# EAGLE board astronaut_mainboard_2 (EAGLE 7.5.0)
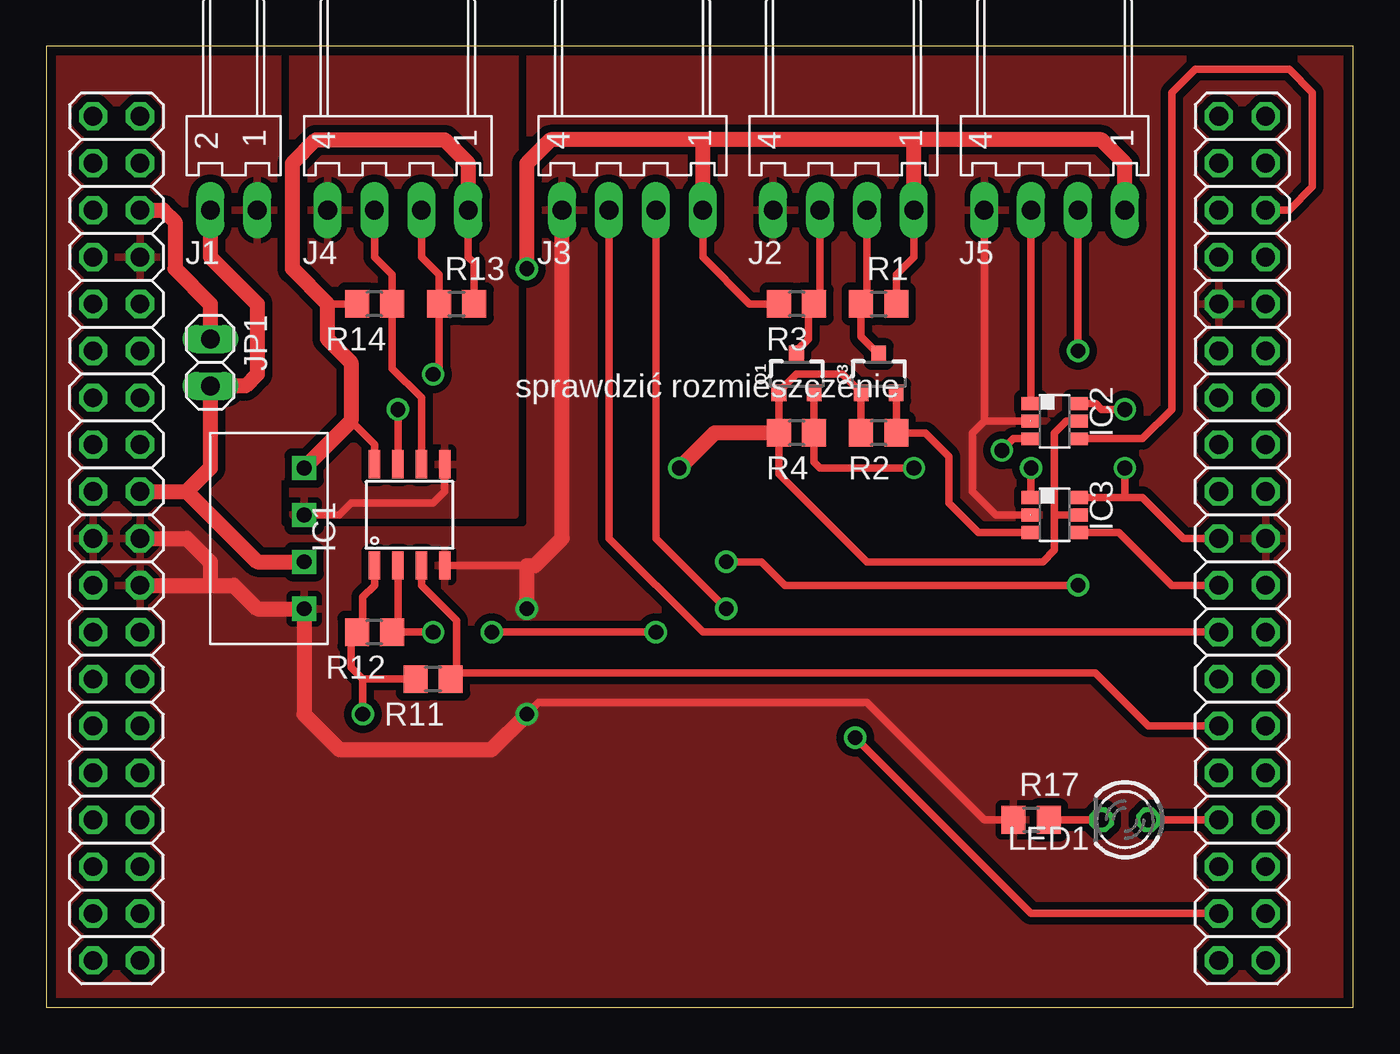
[diagram p0: board, top side]
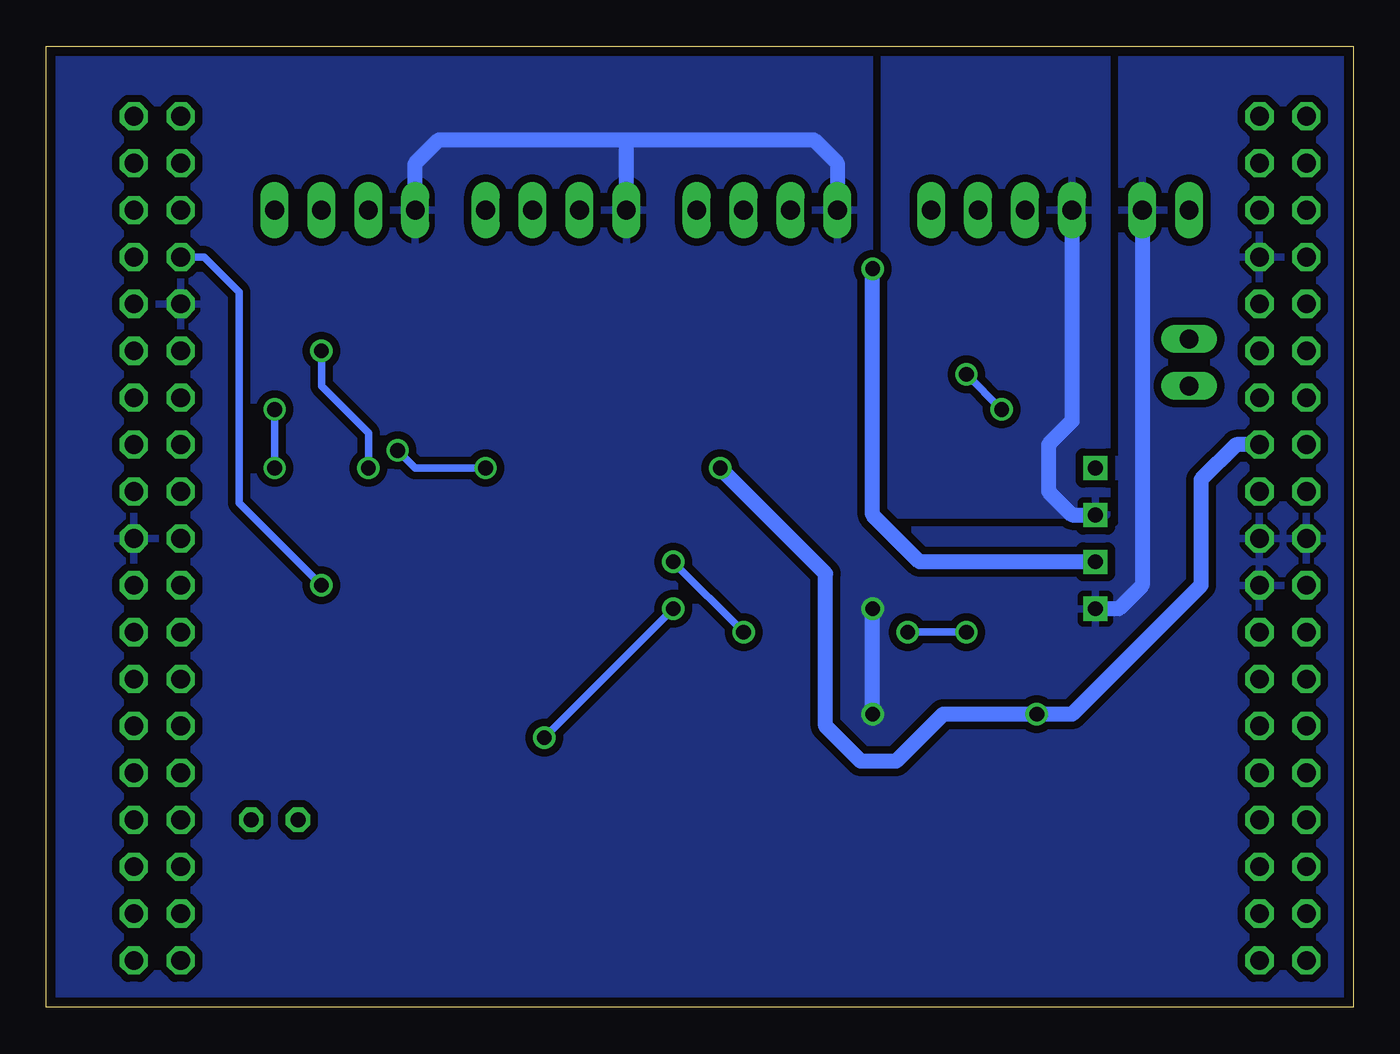
[diagram p1: board, bottom side, seen from below]

Size 70.79 x 52.06 mm. Coordinates in mm from the lower left corner, seen from the top.
Outline: 0,0 70.79,0 70.79,52.06 0,52.06 0,0
Copper layers (1*16): Top 0.035mm / dielectric 1.5mm / Bottom 0.035mm
Design rules "default *": minimum track width 12mil, minimum drill 24mil, track to track 12mil, track to pad 12mil, pad to pad 10mil, via to via 12mil, smd to smd 10mil, copper to edge 20mil, drill to drill 12mil, minimum pad ring 10mil, minimum via ring 8mil, stop-mask expansion 4mil, vias tented up to drill 0mil, thermal gap 12mil

## Footprints (pad centres in the part's own frame; a part is rotated, then mirrored left to right if it is on the bottom)
SO8-COOL = smd 0.61 x 1.524: 1 -1.905,-2.743; 2 -0.635,-2.743; 3 0.635,-2.743; 4 1.905,-2.743; 5 1.905,2.743; 6 0.635,2.743; 7 -0.635,2.743; 8 -1.905,2.743
DBV_R-PDSO-G6 = smd 0.69 x 0.99: 1 -0.95,-1.29; 2 0,-1.29; 3 0.95,-1.29; 4 0.95,1.3; 5 0,1.3; 6 -0.95,1.3
7395-02 = drill 1.016 long: 1 1.27,0; 2 -1.27,0
7395-04 = drill 1.016 long: 1 3.81,0; 2 1.27,0; 3 -1.27,0; 4 -3.81,0
1X02 = drill 1.016 long: 1 -1.27,0; 2 1.27,0
LED3MM = drill 0.813 octagon: A -1.27,0; K 1.27,0
SOT23-3 = smd 0.8 x 0.9: 1 -0.95,-1; 2 0.95,-1; 3 0,1.1
R0805 = smd 1.3 x 1.5: 1 -0.95,0; 2 0.95,0
SIP4 = drill 0.8 square: P$1 1.27,0; P$2 3.81,0; P$3 6.35,0; P$4 8.89,0
MORPHO_HEADERS = drill 1.016 octagon: 1 -31.75,22.86; 2 -29.21,22.86; 3 -31.75,20.32; 4 -29.21,20.32; 5 -31.75,17.78; 6 -29.21,17.78; 7 -31.75,15.24; 8 -29.21,15.24; 9 -31.75,12.7; 10 -29.21,12.7; 11 -31.75,10.16; 12 -29.21,10.16; 13 -31.75,7.62; 14 -29.21,7.62; 15 -31.75,5.08; 16 -29.21,5.08; 17 -31.75,2.54; 18 -29.21,2.54; 19 -31.75,0; 20 -29.21,0; 21 -31.75,-2.54; 22 -29.21,-2.54; 23 -31.75,-5.08; 24 -29.21,-5.08; 25 -31.75,-7.62; 26 -29.21,-7.62; 27 -31.75,-10.16; 28 -29.21,-10.16; 29 -31.75,-12.7; 30 -29.21,-12.7; 31 -31.75,-15.24; 32 -29.21,-15.24; 33 -31.75,-17.78; 34 -29.21,-17.78; 35 -31.75,-20.32; 36 -29.21,-20.32; 37 -31.75,-22.86; 38 -29.21,-22.86; 39 29.21,22.86; 40 31.75,22.86; 41 29.21,20.32; 42 31.75,20.32; 43 29.21,17.78; 44 31.75,17.78; 45 29.21,15.24; 46 31.75,15.24; 47 29.21,12.7; 48 31.75,12.7; 49 29.21,10.16; 50 31.75,10.16; 51 29.21,7.62; 52 31.75,7.62; 53 29.21,5.08; 54 31.75,5.08; 55 29.21,2.54; 56 31.75,2.54; 57 29.21,0; 58 31.75,0; 59 29.21,-2.54; 60 31.75,-2.54; 61 29.21,-5.08; 62 31.75,-5.08; 63 29.21,-7.62; 64 31.75,-7.62; 65 29.21,-10.16; 66 31.75,-10.16; 67 29.21,-12.7; 68 31.75,-12.7; 69 29.21,-15.24; 70 31.75,-15.24; 71 29.21,-17.78; 72 31.75,-17.78; 73 29.21,-20.32; 74 31.75,-20.32; 75 29.21,-22.86; 76 31.75,-22.86

## Placement (x,y rotation side)
IC1  ADUM1250  [SO8-COOL]  19.68,26.67 0 top
IC2  741G3157DBVR  [DBV_R-PDSO-G6]  54.61,31.75 270 top
IC3  741G3157DBVR  [DBV_R-PDSO-G6]  54.61,26.67 270 top
J1  EXT_SUPP  [7395-02]  10.16,43.18 0 top
J2  Arduino Mega (UART)  [7395-04]  43.18,43.18 0 top
J3  HF Comm (UART)  [7395-04]  31.75,43.18 0 top
J4  User Interface (I2C)  [7395-04]  19.05,43.18 0 top
J5  GNSS (UART)  [7395-04]  54.61,43.18 0 top
JP1  [1X02]  8.89,34.92 270 top
LED1  [LED3MM]  58.42,10.16 180 top
Q1  BSS138  [SOT23-3]  40.64,34.29 0 top
Q3  BSS138  [SOT23-3]  45.08,34.29 0 top
R1  10k  [R0805]  45.08,38.1 0 top
R2  10k  [R0805]  45.08,31.11 180 top
R3  10k  [R0805]  40.64,38.1 180 top
R4  10k  [R0805]  40.64,31.11 180 top
R11  470  [R0805]  20.96,17.78 180 top
R12  470  [R0805]  17.78,20.32 180 top
R13  470  [R0805]  22.23,38.1 0 top
R14  470  [R0805]  17.78,38.1 180 top
R17  470  [R0805]  53.34,10.16 0 top
U$2  AM1S-0505  [SIP4]  13.97,20.32 90 top
U$3  NUCLEO_F411RE_MORPHO  [MORPHO_HEADERS]  34.29,25.4 0 top

## Library data of the parts
IC1 = analog-devices-3
IC2 IC3 = 74xx-little-de
J1-J5 = EP_molex_6410_7395
JP1 = pinhead
LED1 = led
Q1 Q3 = SparkFun-DiscreteSemi; PROD_ID: TRANS-12988
R1-R4 R11-R14 R17 = rcl
U$2 = am1s
U$3 = stm32_nucleo_shield

## Nets
+5V: J1.2 J2.1 J3.1 J5.1 JP1.2 R1.2 R3.2 U$2.P$2 U$3.18
AGND: U$3.70
ARDU_PIN_1: J2.2 Q3.3 R1.1
ARDU_PIN_2: J2.3 Q1.3 R3.1
E5V: JP1.1 U$3.6
GND: IC1.4 IC2.2 IC3.2 J1.1 J2.4 J3.4 J5.4 R17.1 U$2.P$1 U$3.8 U$3.19 U$3.20 U$3.22 U$3.47 U$3.58
GND4: IC1.5 J4.4 U$2.P$3
I2C2_SCL: IC1.3 R11.1 U$3.65
I2C2_SDA: IC1.2 R12.1 U$3.45
LED_DGB: LED1.A U$3.69
N$1: IC1.7 J4.2 R13.1
N$3: LED1.K R17.2
N$4: IC1.6 J4.3 R14.1
U5V: U$3.46
USART1_RX: J3.2 U$3.73
USART1_TX: J3.3 U$3.61
USART6_RX: IC3.4 U$3.59
USART6_RX_A: IC3.3 Q3.2 R2.1
USART6_RX_G: IC3.1 J5.2
USART6_SEL: IC2.6 IC3.6 U$3.57
USART6_TX: IC2.4 U$3.44
USART6_TX_A: IC2.3 Q1.2 R4.1
USART6_TX_G: IC2.1 J5.3
VBAT: U$3.33
VCC: IC1.1 IC2.5 IC3.5 Q1.1 Q3.1 R2.2 R4.2 R11.2 R12.2 U$3.16
VDD: U$3.5
VEE: IC1.8 J4.1 R13.2 R14.2 U$2.P$4
VIN: U$3.24

## Tracks (layer width: path | path; a pad name or v marks a point on that pad's centre or on a via)
+5V  (via drill 0.8)
  Top 0.406: R1.2 46.03,39.69 46.99,40.64 J2.1 | J3.1 35.56,40.64 38.1,38.1 R3.2
  Top 0.813: U$3.18 7.62,27.94 | 7.62,27.94 11.43,24.13 U$2.P$2 | J5.1 58.42,45.72 57.15,46.99 46.99,46.99 | J2.1 46.99,46.99 | 46.99,46.99 35.56,46.99 | 35.56,46.99 27.3,46.99 26.04,45.72 v26.04,40.01 | J3.1 35.56,46.99 | 7.62,27.94 8.89,29.21 JP1.2 10.79,33.66 11.43,34.29 11.43,38.1 8.89,40.64 J1.2
  Bottom 0.813: U$2.P$2 23.5,24.13 26.04,26.67 v26.04,40.01
ARDU_PIN_1
  Top 0.406: J2.2 44.45,38.41 R1.1 44.13,36.34 Q3.3
ARDU_PIN_2
  Top 0.406: J2.3 41.91,38.42 R3.1 41.27,37.78 41.27,36.2 40.64,35.56 Q1.3
E5V
  Top 0.813: U$3.6 6.35,43.18 6.99,42.55 6.99,40.01 8.89,38.1 JP1.1
GND  (via drill 0.8)
  Top 0.406: IC3.2 51.43,26.67 50.16,27.94 50.16,31.11 50.8,31.75 | 50.8,31.75 IC2.2 | 50.8,31.75 J5.4 | IC1.4 26.04,23.93 | v26.04,15.88 26.67,16.51 44.45,16.51 50.8,10.16 R17.1
  Top 0.813: U$3.22 8.89,22.86 | v26.04,15.88 24.13,13.97 15.88,13.97 13.97,15.88 U$2.P$1 11.43,21.59 10.16,22.86 8.89,22.86 | J3.4 27.94,25.4 26.47,23.93 26.04,23.93 v26.04,21.59 | U$3.20 7.62,25.4 8.89,24.13 8.89,22.86
  Bottom 0.813: J5.4 50.8,45.72 49.53,46.99 39.37,46.99 | 39.37,46.99 29.21,46.99 27.94,45.72 J3.4 | J2.4 39.37,46.99 | v26.04,15.88 v26.04,21.59 | J1.1 11.43,22.86 12.7,21.59 U$2.P$1
  pour Top (isolate 0.406, rank 6): 0,52.07 71.12,52.07 71.12,0 0,0
  pour Bottom (isolate 0.406, rank 6): 0,52.07 71.12,52.07 71.12,0 0,0
GND4
  Top 0.406: IC1.5 21.59,27.94 20.96,27.3 16.51,27.3 15.88,26.67 U$2.P$3
  Bottom 0.813: J4.4 15.24,31.75 16.51,30.48 16.51,27.94 15.24,26.67 U$2.P$3
  pour Top (isolate 0.406): 13.34,52.07 25.4,52.07 25.4,26.67 13.34,26.67
  pour Bottom (isolate 0.406): 25.4,52.07 25.4,26.67 13.34,26.67 13.34,52.07
I2C2_SCL
  Top 0.406: IC1.3 20.32,22.86 22.23,20.95 22.23,18.1 | 22.23,18.1 R11.1 | 22.23,18.1 56.83,18.1 59.69,15.24 U$3.65
I2C2_SDA  (via drill 0.8)
  Top 0.406: R12.1 19.05,20.64 IC1.2 19.05,20.32 v20.96,20.32 | v24.13,20.32 v33.02,20.32 | v36.83,24.13 38.73,24.13 40,22.86 v55.88,22.86
  Bottom 0.406: v20.96,20.32 v24.13,20.32 | v33.02,20.32 v36.83,24.13 | v55.88,22.86 60.32,27.3 60.32,38.73 62.23,40.64 U$3.45
LED_DGB
  Top 0.406: U$3.69 LED1.A
N$1  (via drill 0.8)
  Top 0.406: J4.2 20.32,40.64 21.28,39.69 R13.1 21.28,34.61 v20.96,34.29 | IC1.7 v19.05,32.38
  Bottom 0.406: v19.05,32.38 v20.96,34.29
N$3
  Top 0.406: LED1.K R17.2
N$4
  Top 0.406: J4.3 17.78,40.64 18.73,39.69 R14.1 18.73,34.61 20.32,33.02 IC1.6
USART1_RX  (via drill 0.8)
  Top 0.406: U$3.73 53.34,5.08 v43.81,14.61 | v36.83,21.59 33.02,25.4 J3.2
  Bottom 0.406: v36.83,21.59 v43.81,14.61
USART1_TX
  Top 0.406: U$3.61 35.56,20.32 30.48,25.4 J3.3
USART6_RX
  Top 0.406: IC3.4 58.1,25.72 60.96,22.86 U$3.59
USART6_RX_A
  Top 0.406: Q3.2 R2.1 47.62,31.11 48.89,29.84 48.89,27.3 50.48,25.72 IC3.3
USART6_RX_G  (via drill 0.8)
  Top 0.406: J5.2 v55.88,35.56 | IC3.1 53.32,29.19 v53.34,29.21
  Bottom 0.406: v53.34,29.21 53.34,31.11 55.88,33.66 v55.88,35.56
USART6_SEL  (via drill 0.8)
  Top 0.406: IC3.6 58.42,27.62 | 58.42,27.62 59.38,27.62 61.59,25.4 U$3.57 | IC2.6 56.83,32.7 57.15,32.38 v58.42,32.38 | v58.42,29.21 58.42,27.62
  Bottom 0.406: v58.42,32.38 v58.42,29.21
USART6_TX
  Top 0.406: U$3.44 67.31,43.18 68.58,44.45 68.58,49.53 67.31,50.8 62.23,50.8 60.96,49.53 60.96,32.38 59.38,30.8 IC2.4
USART6_TX_A  (via drill 0.8)
  Top 0.406: Q1.2 R4.1 41.59,29.53 41.91,29.21 v46.99,29.21 | IC2.3 52.39,30.8 v51.75,30.16
  Bottom 0.406: v46.99,29.21 50.8,29.21 v51.75,30.16
USART6_TX_G
  Top 0.406: IC2.1 53.32,43.16 J5.3
VCC  (via drill 0.8)
  Top 0.406: IC1.1 17.78,22.86 17.14,22.23 17.14,20.64 R12.2 16.51,20 16.51,18.41 17.14,17.78 | R11.2 17.14,17.78 | R2.2 Q3.1 43.13,34.29 40.64,34.29 39.69,33.34 Q1.1 R4.2 39.69,28.89 44.45,24.13 53.97,24.13 54.61,24.77 54.61,26.67 | IC3.5 54.61,26.67 | 54.61,26.67 54.61,31.11 55.24,31.75 IC2.5 | 17.14,17.78 v17.14,15.88
  Top 0.813: R4.2 36.2,31.11 v34.29,29.21
  Bottom 0.813: U$3.16 6.35,30.48 8.26,28.57 8.26,22.86 15.24,15.88 v17.14,15.88 22.23,15.88 24.77,13.34 26.67,13.34 28.57,15.24 28.57,23.5 v34.29,29.21
VEE
  Top 0.406: IC1.8 17.78,30.48 16.51,31.75 | R13.2 23.18,40.33 22.86,40.64 J4.1 | 15.24,38.1 R14.2
  Top 0.813: U$2.P$4 16.51,31.75 16.51,34.92 15.24,36.2 15.24,38.1 13.34,40.01 13.34,45.72 14.61,46.99 21.59,46.99 22.86,45.72 J4.1